# EAGLE board untitled (EAGLE 6.1)
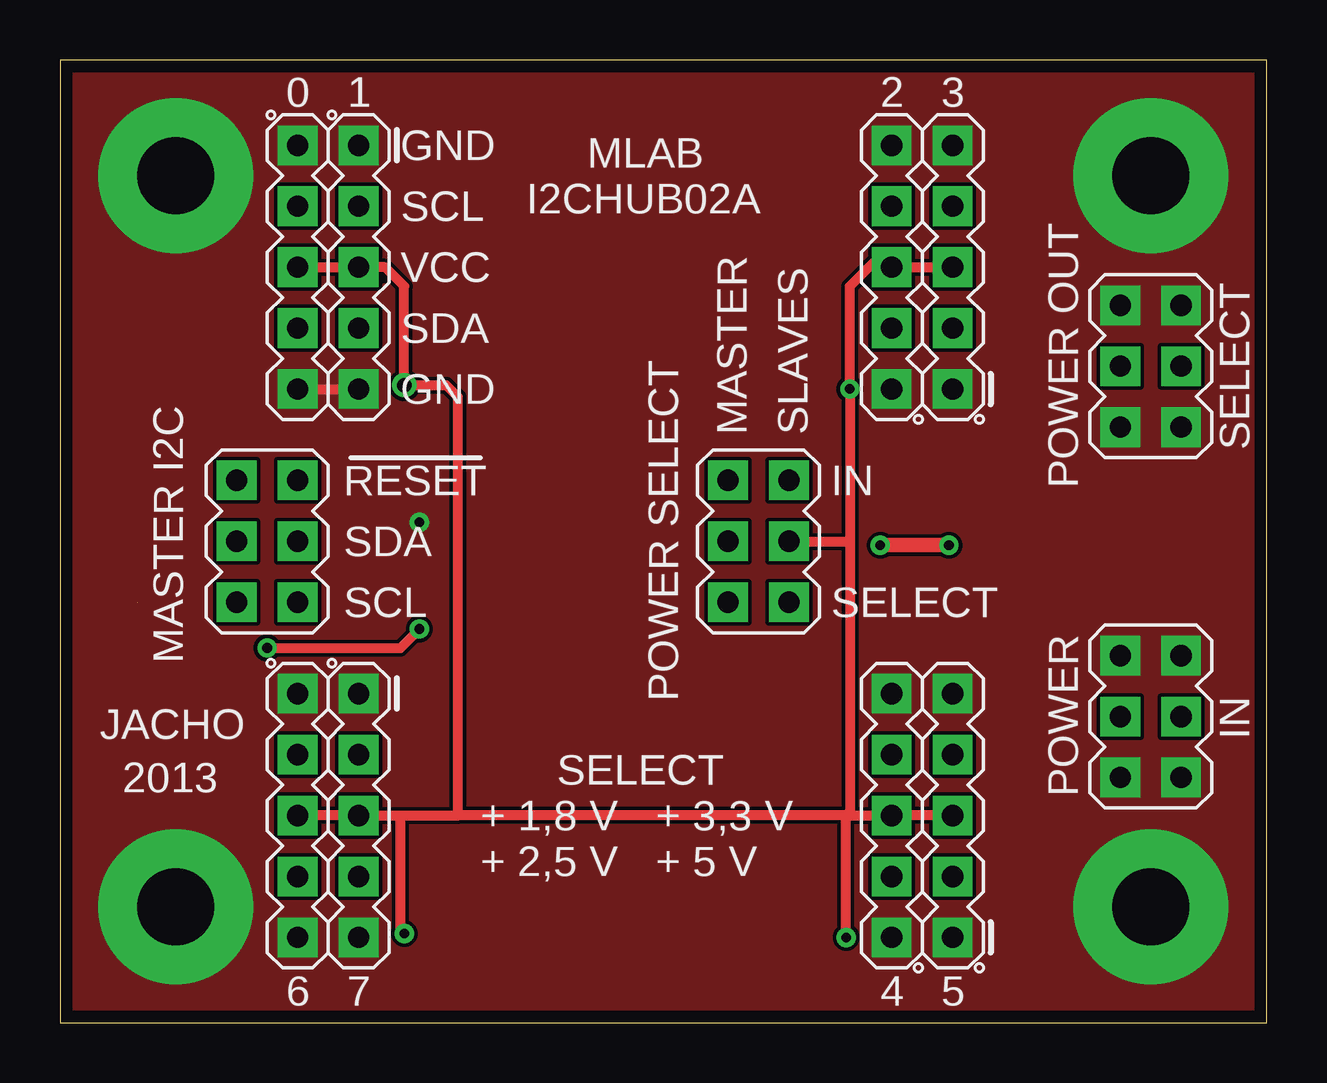
[diagram p0: board, top side]
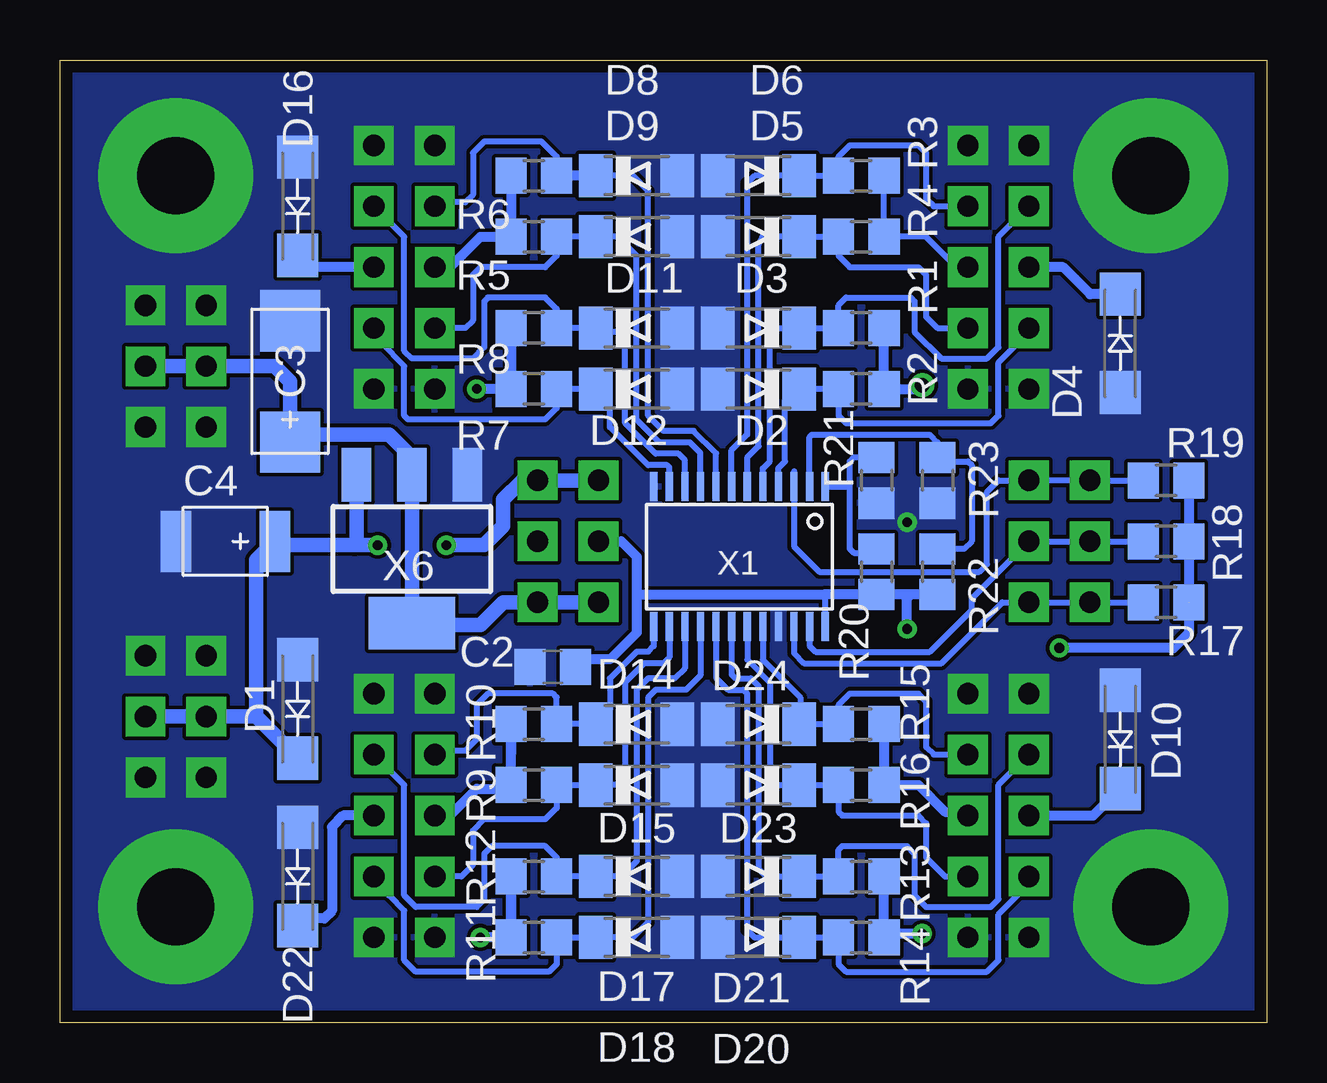
[diagram p1: board, bottom side, seen from below]

Size 50.29 x 40.13 mm. Coordinates in mm from the lower left corner, seen from the top.
Outline: 0,0 50.29,0 50.29,40.13 0,40.13 0,0
Copper layers (1*16): Top 0.035mm / dielectric 1.5mm / Bottom 0.035mm
Design rules: minimum track width 8mil, minimum drill 16mil, track to track 6mil, track to pad 6mil, pad to pad 6mil, via to via 6mil, smd to smd 6mil, copper to edge 20mil, drill to drill 8mil, minimum pad ring 10mil, minimum via ring 8mil, stop-mask expansion 4mil, vias tented up to drill 25mil, thermal gap 0mil

## Footprints (pad centres in the part's own frame; a part is rotated, then mirrored left to right if it is on the bottom)
C0805 = smd 1.3 x 1.5: 1 -0.95,0; 2 0.95,0
C = smd 2.55 x 2.5: + 2.525,0; - -2.525,0
B = smd 1.27 x 2.54: + 2.223,0; - -1.905,0
SMA = smd 1.8 x 1.7: A -2.05,0; K 2.05,0
MINIMELF = smd 1.4 x 1.8: A 1.7,0; C -1.7,0
0805 = smd 1.3 x 1.5: 1 -0.95,0; 2 0.95,0
MA05-1 = drill 0.889 pad 1.651 square: 1 -5.08,0; 2 -2.54,0; 3 0,0; 4 2.54,0; 5 5.08,0
MA03-2 = drill 0.889 pad 1.651 square: 1 -2.54,-1.27; 2 -2.54,1.27; 3 0,-1.27; 4 0,1.27; 5 2.54,-1.27; 6 2.54,1.27
TSS0P24 = smd 0.3 x 1.2: 1 -3.575,-2.918; 2 -2.925,-2.918; 3 -2.275,-2.918; 4 -1.625,-2.918; 5 -0.975,-2.918; 6 -0.325,-2.918; 7 0.325,-2.918; 8 0.975,-2.918; 9 1.625,-2.918; 10 2.275,-2.918; 11 2.925,-2.918; 12 3.575,-2.918; 13 3.575,2.918; 14 2.925,2.918; 15 2.275,2.918; 16 1.625,2.918; 17 0.975,2.918; 18 0.325,2.918; 19 -0.325,2.918; 20 -0.975,2.918; 21 -1.625,2.918; 22 -2.275,2.918; 23 -2.925,2.918; 24 -3.575,2.918
SROUB3M = drill 3.2 pad 6.452: P$1 0,0
SOT223 = smd 1.219 x 2.235: 1 -2.311,-3.099; 2 0,-3.099; 3 2.311,-3.099 | smd 3.6 x 2.2: 4 0,3.099

## Placement (x,y rotation side)
C2  100nF  [C0805]  29.75,14.83 180 bottom
C3  47uF  [C]  40.7,26.73 270 bottom
C4  10uF  [B]  43.56,20.07 0 bottom
D1  [SMA]  40.39,13.08 270 bottom
D2  ZD  [MINIMELF]  21.18,26.42 180 bottom
D3  ZD  [MINIMELF]  21.18,28.96 180 bottom
D4  TRANSIL  [SMA]  6.1,28.32 90 bottom
D5  ZD  [MINIMELF]  21.18,32.77 180 bottom
D6  ZD  [MINIMELF]  21.18,35.31 180 bottom
D8  ZD  [MINIMELF]  26.26,35.31 0 bottom
D9  ZD  [MINIMELF]  26.26,32.77 0 bottom
D10  TRANSIL  [SMA]  6.1,11.81 270 bottom
D11  ZD  [MINIMELF]  26.26,28.96 0 bottom
D12  ZD  [MINIMELF]  26.26,26.42 0 bottom
D14  ZD  [MINIMELF]  26.26,12.45 0 bottom
D15  ZD  [MINIMELF]  26.26,9.91 0 bottom
D16  TRANSIL  [SMA]  40.39,34.04 270 bottom
D17  ZD  [MINIMELF]  26.26,6.1 0 bottom
D18  ZD  [MINIMELF]  26.26,3.56 0 bottom
D20  ZD  [MINIMELF]  21.18,3.56 180 bottom
D21  ZD  [MINIMELF]  21.18,6.1 180 bottom
D22  TRANSIL  [SMA]  40.39,6.1 270 bottom
D23  ZD  [MINIMELF]  21.18,9.91 180 bottom
D24  ZD  [MINIMELF]  21.18,12.45 180 bottom
R1  4k7  [0805]  16.89,28.96 0 bottom
R2  4k7  [0805]  16.89,26.42 0 bottom
R3  [0805]  16.89,35.31 0 bottom
R4  [0805]  16.89,32.77 0 bottom
R5  [0805]  30.54,32.77 180 bottom
R6  [0805]  30.54,35.31 180 bottom
R7  [0805]  30.54,26.42 180 bottom
R8  [0805]  30.54,28.96 180 bottom
R9  [0805]  30.54,9.91 180 bottom
R10  [0805]  30.54,12.45 180 bottom
R11  [0805]  30.54,3.56 180 bottom
R12  [0805]  30.54,6.1 180 bottom
R13  [0805]  16.89,6.1 0 bottom
R14  [0805]  16.89,3.56 0 bottom
R15  [0805]  16.89,12.45 0 bottom
R16  [0805]  16.89,9.91 0 bottom
R17  4k7  [0805]  4.19,17.53 0 bottom
R18  4k7  [0805]  4.19,20.07 0 bottom
R19  4k7  [0805]  4.19,22.61 0 bottom
R20  0R  [0805]  16.26,18.8 270 bottom
R21  0R  [0805]  16.26,22.61 90 bottom
R22  0R  [0805]  13.72,18.8 270 bottom
R23  0R  [0805]  13.72,22.61 90 bottom
SV1  [MA05-1]  9.91,31.5 270 top
SV2  [MA05-1]  12.45,31.5 270 top
SV3  [MA05-1]  34.67,31.5 90 top
SV4  [MA05-1]  37.21,31.5 90 top
SV5  [MA05-1]  34.67,8.64 90 top
SV6  [MA05-1]  37.21,8.64 90 top
SV7  [MA05-1]  9.91,8.64 270 top
SV8  [MA05-1]  12.45,8.64 270 top
SV9  [MA03-2]  8.64,20.07 90 top
SV10  [MA03-2]  45.47,12.76 270 top
SV11  [MA03-2]  45.47,27.37 270 top
SW1  [MA03-2]  29.11,20.07 270 top
X1  [TSS0P24]  21.97,19.43 180 bottom
X2  SROUB3M  [SROUB3M]  4.83,4.83 0 top
X3  SROUB3M  [SROUB3M]  4.83,35.31 0 top
X4  SROUB3M  [SROUB3M]  45.47,4.83 0 top
X5  SROUB3M  [SROUB3M]  45.47,35.31 0 top
X6  LM1117-3.3  [SOT223]  35.62,19.75 180 bottom

## Library data of the parts
C2-C4 = moje_C
D1 X2-X5 = moje
D2-D6 D8-D12 D14-D18 D20-D24 = moje_diody
R1-R23 = moje_R
SV1-SV11 = moje_hrebinky; OC_FARNELL: unknown; OC_NEWARK: unknown
SW1 = moje_hrebinky
X1 = moje_io
X6 = moje_stabil

## Nets
+3.3V: C3.+ SV11.3 SV11.4 SW1.5 SW1.6 X6.2 X6.4
+V1: D4.K D10.K D16.K D22.K R1.2 R2.2 R3.2 R4.2 R5.2 R6.2 R7.2 R8.2 R9.2 R10.2 R11.2 R12.2 R13.2 R14.2 R15.2 R16.2 SV1.3 SV2.3 SV3.3 SV4.3 SV5.3 SV6.3 SV7.3 SV8.3 SW1.4
+VCC: C4.+ D1.K SV10.3 SV10.4 SW1.1 SW1.2 X6.3
/RESET: R19.1 SV9.5 SV9.6 X1.3
GND: C2.2 C3.- C4.- D1.A D2.A D3.A D4.A D5.A D6.A D8.A D9.A D10.A D11.A D12.A D14.A D15.A D16.A D17.A D18.A D20.A D21.A D22.A D23.A D24.A R21.1 R23.1 SV1.1 SV1.5 SV2.1 SV2.5 SV3.1 SV3.5 SV4.1 SV4.5 SV5.1 SV5.5 SV6.1 SV6.5 SV7.1 SV7.5 SV8.1 SV8.5 SV10.1 SV10.2 SV10.5 SV10.6 SV11.1 SV11.2 SV11.5 SV11.6 X1.12 X1.21 X2.P$1 X3.P$1 X4.P$1 X5.P$1 X6.1
N$5: C2.1 R17.2 R18.2 R19.2 R20.2 R22.2 SW1.3 X1.24
N$20: R20.1 R21.2 X1.1
N$22: R22.1 R23.2 X1.2
SC0: D3.C R1.1 SV1.2 X1.5
SC1: D6.C R3.1 SV2.2 X1.7
SC2: D9.C R5.1 SV3.2 X1.9
SC3: D12.C R7.1 SV4.2 X1.11
SC4: D15.C R9.1 SV5.2 X1.14
SC5: D18.C R11.1 SV6.2 X1.16
SC6: D21.C R13.1 SV7.2 X1.18
SC7: D24.C R15.1 SV8.2 X1.20
SCL: R17.1 SV9.1 SV9.2 X1.22
SD0: D2.C R2.1 SV1.4 X1.4
SD1: D5.C R4.1 SV2.4 X1.6
SD2: D8.C R6.1 SV3.4 X1.8
SD3: D11.C R8.1 SV4.4 X1.10
SD4: D14.C R10.1 SV5.4 X1.13
SD5: D17.C R12.1 SV6.4 X1.15
SD6: D20.C R14.1 SV7.4 X1.17
SD7: D23.C R16.1 SV8.4 X1.19
SDA: R18.1 SV9.3 SV9.4 X1.23

## Tracks (layer width: path | path; a pad name or v marks a point on that pad's centre or on a via)
+3.3V
  Bottom 0.61: SW1.5 SW1.6 31.81,17.53 32.77,16.57 35.55,16.57 X6.4 X6.2 35.62,23.56 36.58,24.51 40.7,24.51 | SV11.4 SV11.3 41.34,27.37 40.7,26.73 40.7,24.51 | 40.7,24.51 40.7,24.35 C3.+ 40.7,24.19
+V1  (via drill 0.4, 0.6)
  Top 0.406: SV1.3 SV2.3 13.56,31.5 14.35,30.7 v14.35,26.57 16.1,26.57 16.57,26.1 16.57,8.64 | v14.35,3.71 14.19,3.87 14.19,8.64 | SV7.3 SV8.3 14.19,8.64 | 37.37,8.64 SV6.3 SV5.3 32.77,8.64 | v32.77,3.56 32.77,8.64 | 32.77,8.64 16.57,8.64 | 14.19,8.64 16.57,8.64 | SV4.3 SV3.3 34.51,31.65 33.88,31.65 32.93,30.7 v32.93,26.42 32.93,20.07 | SW1.4 32.93,20.07 | 32.93,20.07 32.93,8.79 32.77,8.64
  Bottom 0.254: 16.1,35.15 15.94,34.99 R4.2 14.19,32.77 12.92,31.5 SV2.3
  Bottom 0.406: D4.K 7.35,30.37 8.48,31.5 SV1.3 | R1.2 R2.2 14.51,26.42 v14.35,26.57 | SV7.3 7.22,8.64 D10.K | R15.2 R16.2 14.51,9.91 13.4,8.79 12.61,8.79 SV8.3 | R13.2 R14.2 15.78,3.71 v14.35,3.71 | SV5.3 34.04,8.64 32.93,9.75 31.65,9.75 R9.2 R10.2 31.49,11.18 31.5,11.18 | SV6.3 38.48,8.64 38.96,8.16 38.96,4.67 39.28,4.35 40.08,4.35 D22.K | R11.2 R12.2 R11.2 v32.77,3.56 | 16.1,35.15 R3.2 | SV3.3 34.04,31.5 32.77,32.77 R5.2 R6.2 | SV4.3 39.9,31.5 D16.K | R8.2 R7.2 v32.93,26.42
+VCC  (via drill 0.4)
  Top 0.61: v34.2,19.91 v37.05,19.91
  Bottom 0.61: X6.3 37.94,19.98 38.01,19.91 | SW1.1 SW1.2 30.86,22.61 31.02,22.61 31.81,21.81 31.81,20.7 32.61,19.91 v34.2,19.91 | v37.05,19.91 38.01,19.91 | 38.01,19.91 41.18,19.91 C4.+ 42.12,19.29 42.12,12.76 | SV10.4 SV10.3 42.12,12.76 | 42.12,12.76 D1.K
/RESET
  Bottom 0.254: 19.7,22.98 X1.3 19.7,19.86 18.64,18.8 11.97,18.8 11.65,19.11 11.65,22.13 11.18,22.61 SV9.5 SV9.6 R19.1
GND  (via drill 0.4)
  Top 0.406: SV1.5 SV2.5
  other vias: 14.99,20.86
  pour Bottom: 0.06,40.07 0.06,-0.25 50.23,-0.25 50.23,40.23 -0.1,40.23 -0.1,39.91
  pour Top: 0.22,39.91 50.55,39.91 50.55,-1.37 0.06,-1.37 0.06,39.91
N$5  (via drill 0.4)  (1 unrouted)
  Top 0.406: v8.64,15.62 14.19,15.62 v14.99,16.41
  Bottom 0.254: X1.24 18.4,17.76 18.48,17.85
  Bottom 0.406: R19.2 R18.2 3.24,19.91 R17.2 | R17.2 3.24,16.25 3.87,15.62 v8.64,15.62 | R22.2 14.83,17.85 | 14.83,17.85 R20.2 18.48,17.85 18.48,17.84 26.26,17.84 | C2.1 28.8,14.98 28.64,15.14 27.37,15.14 26.26,16.26 26.26,17.84 | v14.99,16.41 14.99,17.69 14.83,17.85 | SW1.3 26.89,20.07 26.26,19.43 26.26,17.84
N$20
  Bottom 0.254: R21.2 17.21,23.56 17.37,23.4 17.37,22.29 | R20.1 16.41,19.59 17.21,19.59 17.37,19.75 17.37,22.29 | X1.1 17.43,22.35 17.37,22.29
N$22
  Bottom 0.254: X1.2 19.05,24.42 18.95,24.51 14.03,24.51 13.72,24.19 R23.2 13.72,23.4 12.45,23.4 12.29,23.24 12.29,20.07 12.61,19.75 13.56,19.75 | 13.56,19.75 13.88,19.75 | R22.1 13.56,19.75
SC0
  Bottom 0.254: D3.C 19.43,28.96 | 19.43,28.96 R1.1 17.84,29.91 17.53,30.23 14.83,30.23 14.67,30.07 14.67,28.8 13.56,27.69 11.65,27.69 11.18,28.16 11.18,32.77 SV1.2 | D3.C 20.38,28.96 20.7,28.64 20.7,23.4 21,23.11 X1.5 | D3.C 19.48,28.68 19.43,28.64 19.43,28.96
SC1
  Bottom 0.254: X1.7 22.3,23.87 21.65,24.51 21.65,34.99 21.34,35.31 D6.C R3.1 17.84,36.1 17.37,36.58 14.51,36.58 14.19,36.26 14.19,34.35 13.88,34.04 SV2.2
SC2
  Bottom 0.254: X1.9 23.6,23.75 24.04,24.19 25.3,24.19 26.26,25.15 26.26,31.97 27.05,32.77 D9.C R5.1 29.59,31.97 30.07,31.5 32.77,31.5 33.08,31.18 33.08,29.27 33.4,28.96 SV3.2
SC3
  Bottom 0.254: X1.11 24.9,23.15 24.99,23.24 25.78,23.24 27.37,24.83 27.37,25.83 D12.C R7.1 29.59,25.62 30.07,25.15 35.78,25.15 35.94,25.3 35.94,27.37 36.89,28.32 36.89,28.64 SV4.2
SC4
  Bottom 0.254: X1.14 24.9,15.24 25.15,14.99 25.94,14.99 26.73,14.19 26.73,10.22 27.05,9.91 D15.C R9.1 29.59,8.95 30.07,8.48 32.61,8.48 33.08,8 33.08,6.57 33.56,6.1 SV5.2
SC5
  Bottom 0.254: 28,3.56 R11.1 29.59,2.44 29.91,2.13 35.47,2.13 35.94,2.6 35.94,4.67 36.58,5.3 36.58,5.46 SV6.2 | 28,3.56 D18.C 27.84,3.56 | X1.16 23.6,14.47 24.19,13.88 25.46,13.88 25.78,13.56 25.78,4.19 26.42,3.56 27.69,3.56 27.84,3.4 28,3.56 | 28.16,3.4 28,3.56
SC6
  Bottom 0.254: X1.18 22.3,14.52 22.13,14.35 21.49,14.35 21.18,14.03 21.18,6.41 20.86,6.1 D21.C R13.1 17.84,7.21 17.68,7.37 14.99,7.37 14.67,7.05 14.67,5.3 14.19,4.83 11.49,4.83 11.18,5.14 11.18,9.91 SV7.2
SC7
  Bottom 0.254: X1.20 21,15.12 19.43,13.56 19.43,12.49 D24.C R15.1 17.84,13.24 17.37,13.72 14.51,13.72 14.19,13.4 14.19,11.49 13.88,11.18 SV8.2 12.29,11.18
SCL
  Bottom 0.254: R17.1 SV9.2 SV9.1 11.02,17.53 13.56,14.99 19.27,14.99 19.7,15.41 X1.22
SD0
  Bottom 0.254: 19.43,26.42 R2.1 17.84,25.3 17.53,24.99 11.49,24.99 11.18,25.3 11.18,27.53 9.91,28.8 SV1.4 | 19.43,26.42 D2.C 20.07,25.99 20.07,25.78 | X1.4 20.35,23.12 20.07,23.4 20.07,25.78 | 20.07,25.78 19.43,26.42
SD1
  Bottom 0.254: SV2.4 13.72,28.96 14.19,29.43 14.19,31.18 14.51,31.5 17.37,31.5 17.84,31.97 R4.1 D5.C 21.02,32.77 21.18,32.45 21.18,24.04 21.65,23.56 21.65,22.45 21.65,22.44 X1.6
SD2
  Bottom 0.254: X1.8 22.95,23.74 23.88,24.67 25.15,24.67 25.78,25.3 25.78,34.67 26.42,35.31 D8.C | R6.1 29.59,36.1 30.23,36.73 32.61,36.73 33.08,36.26 33.08,34.51 33.4,34.2 34.51,34.2 SV3.4
  Bottom 0.406: R6.1 28,35.31 D8.C
SD3
  Bottom 0.254: D11.C 28,28.96 | 28,28.96 R8.1 29.59,29.75 30.07,30.23 32.45,30.23 32.61,30.07 32.61,28.16 33.08,27.69 35.62,27.69 35.94,28 35.94,32.77 SV4.4 | X1.10 24.25,23.45 24.51,23.72 25.46,23.72 26.73,24.99 26.73,28.48 27.05,28.8 27.84,28.8 28,28.96
SD4
  Bottom 0.254: X1.13 25.55,15.7 25.78,15.46 26.26,15.46 27.37,14.35 27.37,13.04 D14.C R10.1 29.59,13.56 29.75,13.72 32.45,13.72 32.93,13.24 32.93,11.81 33.4,11.34 34.51,11.34 SV5.4
SD5
  Bottom 0.254: X1.15 24.25,14.78 24.67,14.35 25.78,14.35 26.26,13.88 26.26,6.73 26.89,6.1 D17.C R12.1 29.59,6.89 30.07,7.37 32.29,7.37 32.61,7.05 32.61,5.14 32.93,4.83 35.47,4.83 35.94,5.3 35.94,9.91 SV6.4
SD6
  Bottom 0.254: X1.17 22.95,14.37 22.45,13.88 21.81,13.88 21.65,13.72 21.65,3.87 21.34,3.56 19.59,3.56 19.43,3.71 19.43,3.6 D20.C R14.1 17.84,2.44 17.53,2.13 11.65,2.13 11.18,2.6 11.18,4.51 10.07,5.62 10.07,5.94 SV7.4
SD7
  Bottom 0.254: 19.43,9.91 D23.C 20.54,9.91 20.7,10.07 20.7,14.19 21.65,15.14 X1.19 | 19.43,9.91 R16.1 17.84,8.79 17.68,8.64 14.51,8.64 14.19,8.32 14.19,6.89 13.4,6.1 SV8.4 | 19.59,9.75 19.43,9.91
SDA
  Bottom 0.254: R18.1 SV9.4 SV9.3 12.29,17.68 12.29,17.21 14.03,15.46 18.8,15.46 19.05,15.71 X1.23

## Text on the board
tPlace: 0 | 1 | 2 | 3 | GND | MLAB | SCL | I2CHUB02A | VCC | SDA | GND | MASTER | SLAVES | SELECT | POWER OUT | RESET | IN | SDA | SCL | SELECT | MASTER I2C | POWER SELECT | JACHO | IN | 2013 | SELECT | POWER | + 1,8 V | + 3,3 V | + 2,5 V | + 5 V | 6 | 7 | 4 | 5